# Altium PCB Sensorbox_Hub_ESP32.PCBDOC (part 1 of 3)
Units mil, origin at the board's own origin, x right, y up, seen from the top; angles counter-clockwise.
Board outline 895.86 x 2876.17 mil, 2 copper layers (Top, Bot), stack 61.855 mil thick; 68 components, 62 nets, 284 pads, 203 vias.
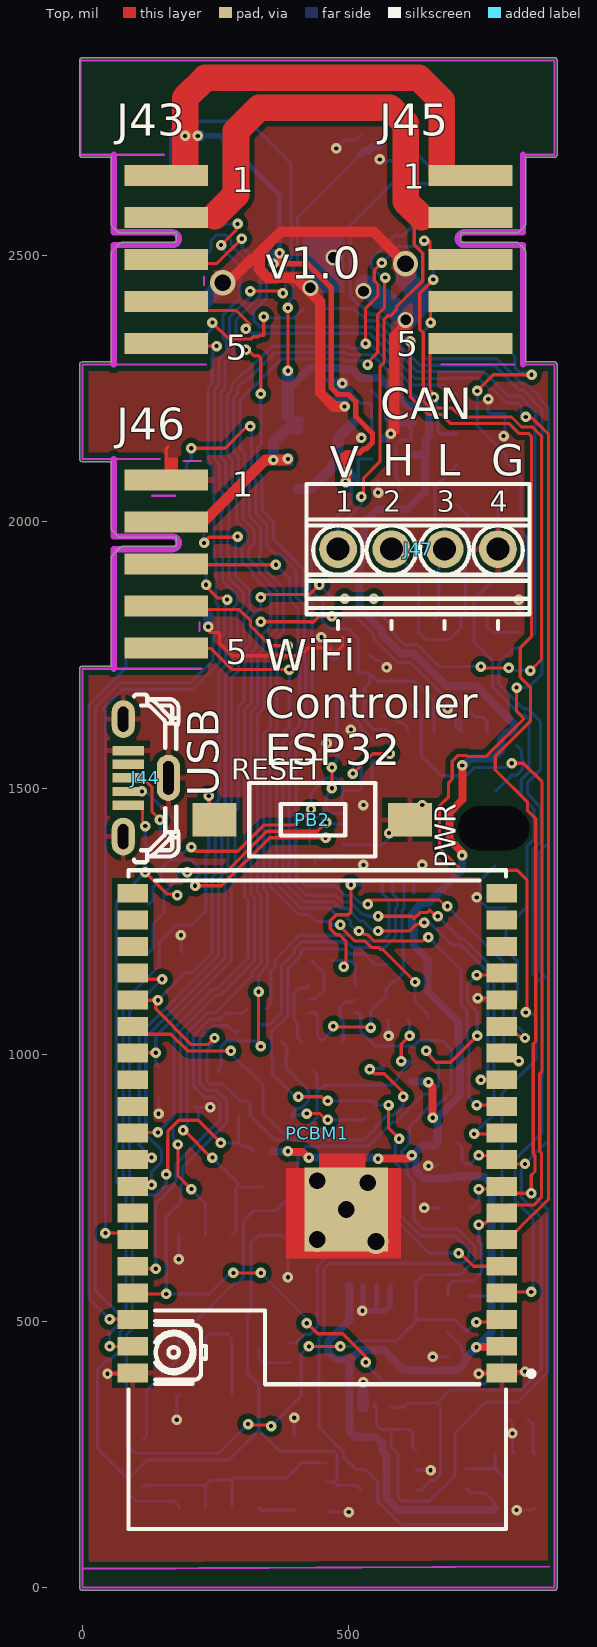
[diagram p0: Top view]
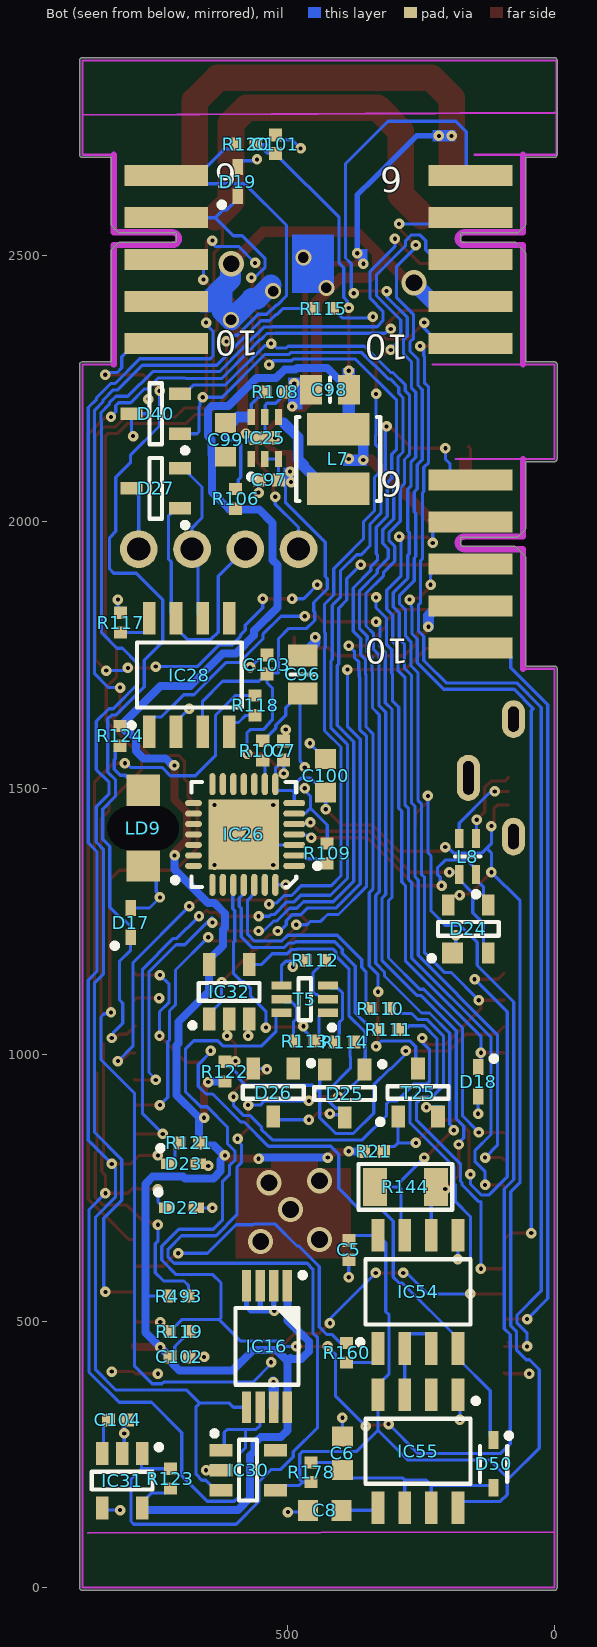
[diagram p1: Bot view, seen from below]
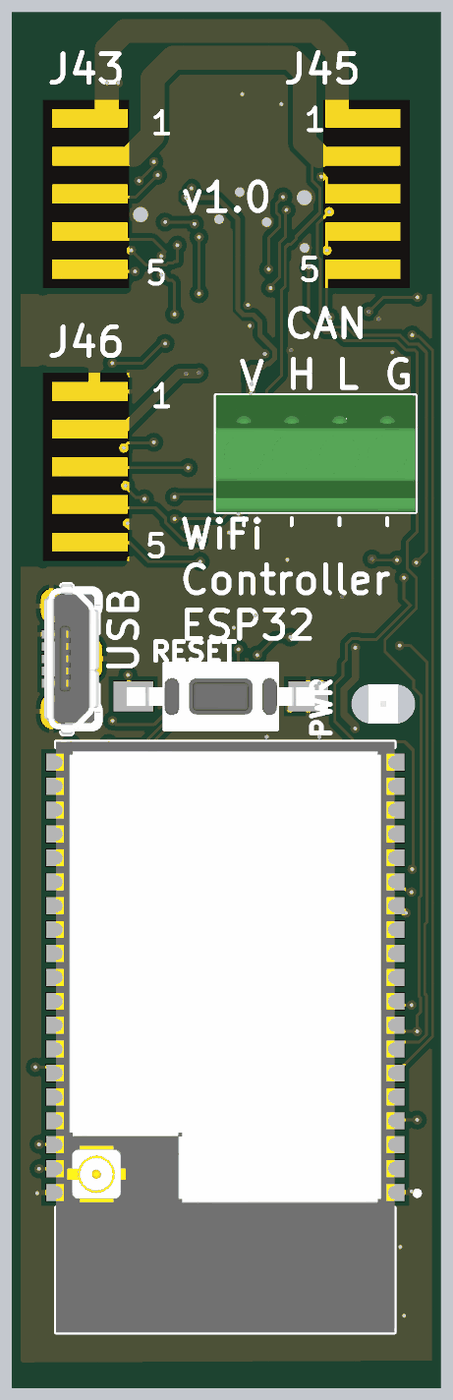
[diagram p3: 3D render of the assembled board from above, using the file's embedded part models]
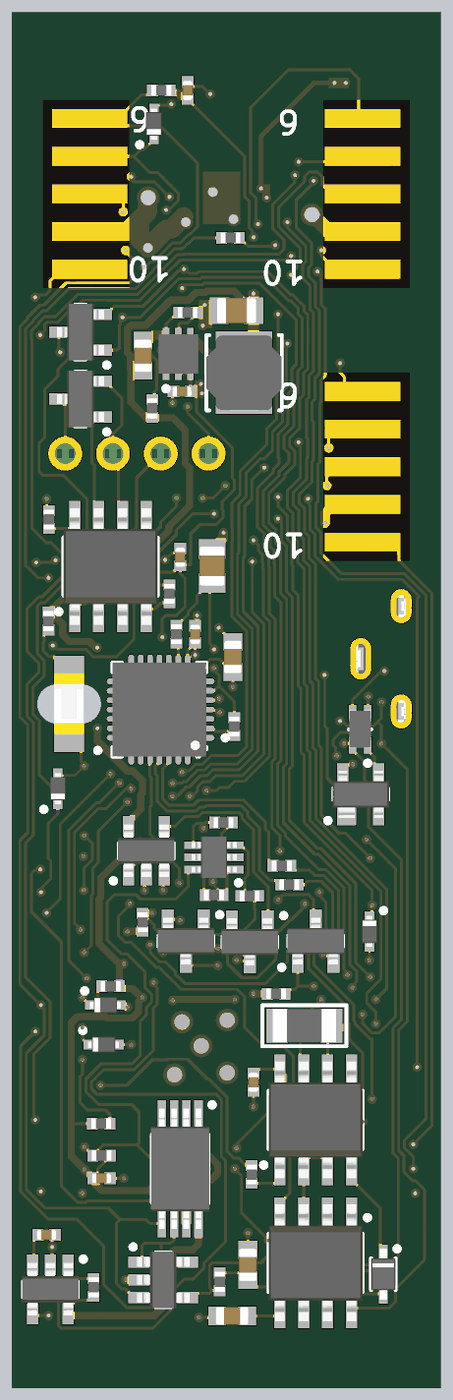
[diagram p4: 3D render of the assembled board from below, using the file's embedded part models]

## Layer stack, top to bottom
TopSolder: solder mask 0.4, Solder Resist, Dk 3.5
Top: signal copper 1.4
Dielectric1: core 59.0551, FR-4, Dk 4.8
Bot: signal copper 1.4
BottomSolder: solder mask 0.4, Solder Resist, Dk 3.5

## Board outline
-5.02,1724.41 cw(c0,1724.41) 0,1729.42 54.04,1729.42 54.04,1933.07 cw(c59.06,1933.07) 55.53,1936.63 55.51,1936.62 71.26,1952.36 71.24,1952.35 cw(c74.8,1948.82) 74.8,1953.83 176.09,1953.83 176.09,1971.36 70.87,1971.36 cw(c70.87,1976.38) 67.3,1972.85 67.32,1972.83 55.51,1984.64 55.53,1984.63 cw(c59.06,1988.19) 54.04,1988.19 54.04,2113.09 0,2113.09 cw(c0,2118.11) -5.01,2118.11 -5.01,2295.27 cw(c0,2295.27) 0,2300.29 54.04,2300.29 54.04,2503.94 cw(c59.06,2503.94) 55.53,2507.5 55.51,2507.48 71.26,2523.23 71.24,2523.21 cw(c74.8,2519.68) 74.8,2524.7 176.09,2524.7 176.09,2542.23 70.87,2542.23 cw(c70.87,2547.24) 67.3,2543.71 67.32,2543.7 55.51,2555.51 55.53,2555.49 cw(c59.06,2559.05) 54.04,2559.05 54.04,2683.96 0,2683.96 cw(c0,2688.98) -5.01,2688.98 -5.01,2866.14 cw(c0,2866.14) 0,2871.16 885.83,2871.16 cw(c885.83,2866.14) 890.84,2866.14 890.84,2688.97 cw(c885.83,2688.97) 885.83,2683.96 831.79,2683.96 831.79,2559.05 cw(c826.77,2559.05) 830.3,2555.49 830.32,2555.51 818.51,2543.7 818.52,2543.71 cw(c814.96,2547.24) 814.96,2542.23 709.74,2542.23 709.74,2524.7 814.96,2524.7 cw(c814.96,2519.68) 818.52,2523.21 818.51,2523.23 826.4,2515.34 ccw(c822.84,2511.81) 826.38,2515.35 ccw(c822.84,2511.81) 826.36,2515.37 826.4,2515.34 830.32,2511.42 830.3,2511.43 cw(c826.77,2507.87) 831.79,2507.87 831.79,2300.29 885.83,2300.29 cw(c885.83,2295.27) 890.84,2295.27 890.84,0 cw(c885.83,0) 885.83,-5.02 0,-5.02 cw(c0,0) -5.02,0

## Design rules (kind name [scope] priority, off if disabled: settings)
Clearance Clearance_DIFF [(InDifferentialPairClass('All Differential Pairs'))] p1: gap=5 ignorepadtopadclearanceinfootprint=FALSE except(0: Arc-Hole Track-Hole SMDPad-Hole THPad-Hole Via-Hole Fill-Hole Poly-Hole Region-Hole Text-Hole; 10: Arc-Poly Track-Poly SMDPad-Poly THPad-Poly Via-Poly Fill-Poly Poly-Poly Poly-Region Poly-Text)
Clearance [All] p2: gap=6 ignorepadtopadclearanceinfootprint=FALSE except(10: Arc-Poly Track-Poly SMDPad-Poly THPad-Poly Via-Poly Fill-Poly Poly-Poly)
DiffPairsRouting [All] p1: maxlimit=10 minlimit=5 mostfreqgap=5 toplayer_minwidth=5 toplayer_maxwidth=15 toplayer_prefwidth=10 bottomlayer_minwidth=5 bottomlayer_maxwidth=15 bottomlayer_prefwidth=10 maxuncoupledlength=500
FabricationTestPointUsage TestPointUsage [All] p1: valid=0 allowmultiple=FALSE
FabricationTestpoint Testpoint [All] p1: side=3 testpointundercomponent=TRUE minsize=40 maxsize=100 preferedsize=60 minholesize=20 maxholesize=40 preferedholesize=32 testpointgrid=1 allowsidetop=TRUE allowsidebottom=TRUE usegrid=TRUE gridtolerance=0.01
HoleSize [All] p1: absolutevalues=TRUE maxlimit=150 minlimit=1 maxpercent=80.000 minpercent=20.000
HoleToHoleClearance [All] p1: gap=1 allowstackedmicrovias=TRUE
MinimumSolderMaskSliver [All] p1: minsoldermaskwidth=0
PlaneClearance [All] p1: clearance=10
PlaneConnect [All] p1: planeconnectstyle=Direct reliefexpansion=20 reliefentries=4 reliefconductorwidth=10 reliefairgap=10
PolygonConnect PolygonConnect_pad [(InPadClass('All Pads'))] p1: connectstyle=Relief reliefconductorwidth=10 reliefentries=4 polygonreliefangle="90 Angle" airgapwidth=10
PolygonConnect [All] p2: connectstyle=Direct reliefconductorwidth=10 reliefentries=4 polygonreliefangle="45 Angle" airgapwidth=10
RoomDefinition Sensorbox_Hub_ESP32 [InComponentClass('Sensorbox_Hub_ESP32')] p1 off: confinementstyle=ConfineIn formatcopy=TRUE lockcomponents=FALSE outline 1777.55,517.7 8972.41,517.7 8972.41,1452.74 1777.55,1452.74
RoutingVias [All] p1: holewidth=7.87 width=19.68 viastyle="Through Hole" minholewidth=7.87 minwidth=19.68 maxholewidth=39.37 maxwidth=47.24
SilkToSilkClearance [All] p1: silktosilkclearance=0
SilkToSolderMaskClearance SilkscreenOverComponentPads [IsPad] p1: minsilkscreentomaskgap=0 clearancetoexposedcopper=TRUE
SolderMaskExpansion [All] p1: expansion=2
Width [All] p1: maxlimit=50 minlimit=5 preferedwidth=5
20 further rules are at their usual default settings.

## Components (designator, comment, footprint, x,y, rotation, side; value= is the part's Value field where it differs from the comment)
C5 "100nF" CAPC1005X55N 385.83,633.86 r270 bottom
C6 "10nF" CAPC1608X87N 397.64,251.97 r270 bottom
C7 "100nF" CAPC1005X55N 507.87,1570.87 r90 bottom
C8 "10nF" CAPC1608X87N 430.71,145.28 r180 bottom
C96 "10uF" CAPC2012X135N 472.44,1713.75 r270 bottom
C97 "1uF" CAPC1005X55N 535.43,2078.74 r180 bottom
C98 "10uF" CAPC2012X135N 421.26,2248.03 r0 bottom
C99 "68pF" CAPC1608X87N 617.13,2153.68 r270 bottom
C100 "1uF" CAPC1608X87N 429.13,1523.62 r90 bottom
C101 "1uF" CAPC1005X55N 523.62,2708.66 r270 bottom
C102 "1uF" CAPC1005X55N 703.74,433.07 r0 bottom
C103 "100nF" CAPC1005X55N 539.37,1732.28 r270 bottom
C104 "100nF" CAPC1005X55N 818.9,314.96 r0 bottom
D17 "PESD3V3S1UB" SODFL1608X65N 795.25,1247.9 r90 bottom
D18 "PESD3V3S1UB" SODFL1608X65N 143.17,949.41 r270 bottom
D19 "PESD3V3S1UB" SODFL1608X65N 594.49,2638.44 r90 bottom
D22 "PESD3V3S1UB" SODFL1608X65N 699.8,712.6 r180 bottom
D23 "PESD3V3S1UB" SODFL1608X65N 695.87,795.27 r180 bottom
D24 "PRTR5V0U2X" SOT190P230X110-4N 161.42,1236.22 r90 bottom
D25 "BAT54C" SOT95P240X130-3N 393.7,927.16 r270 bottom
D26 "BAT54C" SOT95P240X130-3N 527.56,929.13 r270 bottom
D27 "PESD1CAN-UX" SOT95P237X112-3N 748.03,2062.99 r0 bottom
D40 "SM712" SOT95P237X112-3N 748.03,2202.89 r0 bottom
D50 "1N4148WS" SODFL2512X100N 114.17,232.28 r270 bottom
IC16 "M24256-BRDW6" SOP65P640X120-8N 539.37,452.76 r270 bottom
IC25 "AUR9705AGD" SON65P200X200X80-7N-R65X145 543.31,2157.48 r90 bottom
IC26 "CP2102-GM" QFN50P500X500X100-29N-S335 582.68,1413.39 r0 bottom
IC28 "MCP2551-I/SN" SOIC127P600X175-8N 685.04,1712.6 r90 bottom
IC30 "24AA02E48T-I/OT" SOT95P280X145-5N 574.8,220.47 r180 bottom
IC31 "BD5230FVE-TR" SOT95P280X145-5N 811.02,200.79 r270 bottom
IC32 "74V1G66STR" SOT95P280X145-5N 610.24,1118.11 r90 bottom
IC54 "ST485ECDR" SOIC127P600X175-8N 255.91,555.12 r90 bottom
IC55 "NE555D" SOIC127P600X175-8N 255.91,255.91 r270 bottom
J43 "=Family" EDGE10T1B6_P200W1000L0F100X400 157.48,2649.61 r270 top locked
J44 "USB" MOLEX_105133-0011 86.61,1519.68 r90 top
J45 "=Family" EDGE10T5B10_P200W1000L0F100X400 728.35,2334.64 r90 top
J46 "=Family" EDGE10T1B6_P200W1000L0F100X400 157.48,2078.74 r270 top
J47 "=Family" PHOENIX_1725672 629.92,1948.82 r0 top
L7 "2.2uH" IND_MURATA_LQH44PN_P0 405.51,2118.11 r90 bottom
L8 "90R@100MHz" IND_MURATA_DLW21S 162.8,1372.05 r90 bottom
LD9 "Green" LED_KINGBRIGHT_KPTR3216 771.65,1425.2 r270 bottom
PB2 "Push Button" PB_TYCO_FSMSM 431.51,1440.87 r0 top
PCBM1 "ESP32-WROVER-I" PCBM_ESP32-WROVER-I 440.94,728.35 r180 top locked
R21 "100k" RESC1005X40N 338.58,818.9 r0 bottom
R106 "100k" RESC1005X40N 597.95,2043.31 r270 bottom
R107 "10k" RESC1005X40N 547.24,1570.87 r90 bottom
R108 "22k" RESC1005X40N 523.62,2244.09 r0 bottom
R109 "10k" RESC1005X40N 426.26,1377.95 r90 bottom
R110 "220" RESC1005X40N 326.77,1086.61 r180 bottom
R111 "220" RESC1005X40N 311.02,1047.24 r180 bottom
R112 "1k" RESC1005X40N 448.82,1177.17 r180 bottom
R113 "1k" RESC1005X40N 468.5,1025.59 r0 bottom
R114 "220" RESC1005X40N 393.7,1023.62 r180 bottom
R115 "220" RESC1005X40N 433.91,2400.32 r0 bottom
R117 "4k7" RESC1005X40N 814.17,1811.02 r270 bottom
R118 "1k" RESC1005X40N 561.76,1655.65 r270 bottom
R119 "1k" RESC1005X40N 703.74,480.31 r0 bottom
R120 "10k" RESC1005X40N 578.74,2708.66 r180 bottom
R121 "10k" RESC1005X40N 685.04,834.65 r180 bottom
R122 "1k" RESC1005X40N 618.11,968.5 r90 bottom
R123 "10k" RESC1005X40N 720.47,204.72 r90 bottom
R124 "1k" RESC1005X40N 814.96,1598.43 r90 bottom
R144 "120R" 1206R 279.53,751.97 r180 bottom
R160 "1k" RESC1005X40N 389.76,440.94 r270 bottom
R178 "3k9" RESC1005X40N 456.69,216.54 r90 bottom
R493 "1k" RESC1005X40N 704.92,547.24 r180 bottom
T5 "BC847BS" SOT65P210X110-6N 468.5,1104.33 r0 bottom
T25 "BSS138LT1G" SOT95P240X110-3N 255.91,929.13 r90 bottom

## Footprints (in the part's own frame and the unit in brackets; to place one, negate y for a bottom-side part, rotate by r counter-clockwise, add the part's x,y. Pads: shape width x height; smd on the part's side, far side on the other; paste and mask are expansions set on the pad)
1206R [mm]
  rect 1.15x1.8 smd: 1(-1.45,0) 2(1.45,0)
  silkscreen extent -2.24,-1.09 2.24,1.09, body extent -1.67,-0.87 1.68,0.88, height 0.65
CAPC1005X55N [mm] "Chip Capacitor, Body 1.0x0.55mm, IPC Medium Density"
  rect 0.62x0.62 smd: 1(-0.45,0) 2(0.45,0)
  body extent -0.52,-0.27 0.53,0.28, height 0.55
CAPC1608X87N [mm] "Chip Capacitor, Body 1.6x0.8mm IPC Medium Density"
  rect 0.95x1 smd: 1(-0.8,0) 2(0.8,0)
  body extent -0.87,-0.47 0.88,0.48, height 0.87
CAPC2012X135N [mm] "Chip Capacitor, Body 2.0x1.25mm, IPC Medium Density"
  rect 1.05x1.4 smd: 1(-0.9,0) 2(0.9,0)
  silkscreen extent 0,-0.58 0,0.58, body extent -1.05,-0.67 1.05,0.68, height 1.25
EDGE10T1B6_P200W1000L0F100X400 [mm] "10 contacts Board Edge Connector, First Left Top Pad 1, First Left Bottom Pad 2, Pitch 2mm, Length 0mm, Width 10mm, Finger Lenght 4mm, Finger Width 1mm"
  rect 1x4 smd paste-0.5: 1(0,0) 2(2,0) 3(4,0) 4(6,0) 5(8,0)
  rect 1x4 smd far side paste-0.5: 6(0,0) 7(2,0) 8(4,0) 9(6,0) 10(8,0)
  KeepOutLayer lines w0.3: 9,-2.5 3.3,-2.5 3.3,0.3 ccw(c3,0.3) 2.7,0.3 2.7,-2.5 -1,-2.5
EDGE10T5B10_P200W1000L0F100X400 [mm] "10 contacts Board Edge Connector, First Left Top Pad 5, First Left Bottom Pad 10, Pitch 2mm, Length 0mm, Width 10mm, Finger Lenght 4mm, Finger Width 1mm"
  rect 1x4 smd paste-0.5: 1(8,0) 2(6,0) 3(4,0) 4(2,0) 5(0,0)
  rect 1x4 smd far side paste-0.5: 6(8,0) 7(6,0) 8(4,0) 9(2,0) 10(0,0)
  KeepOutLayer lines w0.3: -1,-2.5 4.7,-2.5 4.7,0.3 cw(c5,0.3) 5.3,0.3 5.3,-2.5 9,-2.5
IND_MURATA_DLW21S [mm] "Common Mode Choke Coil, DLW21S Series - Body 2 x 1.2mm"
  rect 0.9x0.4 smd: 1(-0.85,-0.4) 2(0.85,-0.4) 3(0.85,0.4) 4(-0.85,0.4)
  silkscreen extent -1.92,-0.6 0,0.6, body extent -1,-0.6 1,0.6, height 1.4
IND_MURATA_LQH44PN_P0 [mm] "Wire Wound Ferrite Inductor for Power Lines, 4mm L X 4mm W X 1.65mm H, MURATA LQH44PN_P0 Series"
  rect 1.55x3 smd: 1(-1.425,0) 2(1.425,0)
  silkscreen extent -2,-2 2,2, body extent -2,-2 2,2, height 1.65
LED_KINGBRIGHT_KPTR3216 [mm] "Reverse Mount LED 3216, Hole 2.1x2.3mm 0.35mm Height"
  rect 1.5x1.6 smd: 1(1.8,0) 2(-1.8,0)
  oval 1.9x3 hole 2.1 slot 3.4 at 90 deg unplated mask+0.1: 3(0,0)
  silkscreen extent 2.35,1.4 2.6,1.65, body extent -1.6,-0.8 1.6,0.8, height 0.25
MOLEX_105133-0011 [mm] "0.65mm Pitch, Micro-USB Type B Surface Mounte Vertical Receptacle"
  rect 0.45x1.5 smd: 1(-1.3,0) 2(-0.65,0) 3(0,0) 4(0.65,0) 5(1.3,0)
  oval 1.8x1.1 hole 0.5 slot 1.2 at 0 deg: 6(-2.8,0.25) 6(2.8,0.25)
  oval 2.2x1.1 hole 0.5 slot 1.6 at 0 deg: 6(0,-1.9)
  silkscreen extent -4.03,-2.38 3.98,-0.26, body extent -4.02,-2.38 3.98,0.63, height 6.68
PB_TYCO_FSMSM [mm] "Body 3.5x6.0mm, Pushbutton Switch,  TYCO FSMSM Serie"
  rect 2.1x1.6 smd: 1(-4.65,0) 2(4.65,0)
  silkscreen extent -3,-1.75 3,1.75, body extent -5,-1.75 5,1.75, height 4.3
PCBM_ESP32-WROVER-I [mm] "Generic WiFi-BT-BLE MCU Module (IPEX antenna) ,Body 18.00mm x 31.4mm"
  rect 1.45x0.9 smd: 1(-8.8,8.26) 2(-8.8,6.99) 3(-8.8,5.72) 4(-8.8,4.45) 5(-8.8,3.18) 6(-8.8,1.91) 7(-8.8,0.64) 8(-8.8,-0.63) 9(-8.8,-1.9) 10(-8.8,-3.17) 11(-8.8,-4.44) 12(-8.8,-5.71) 13(-8.8,-6.98) 14(-8.8,-8.25) 15(-8.8,-9.52) 16(-8.8,-10.79) 17(-8.8,-12.06) 18(-8.8,-13.33) 19(-8.8,-14.6) 20(8.8,-14.6) 21(8.8,-13.33) 22(8.8,-12.06) 23(8.8,-10.79) 24(8.8,-9.52) 25(8.8,-8.25) 26(8.8,-6.98) 27(8.8,-5.71) 28(8.8,-4.44) 29(8.8,-3.17) 30(8.8,-1.9) 31(8.8,-0.63) 32(8.8,0.64) 33(8.8,1.91) 34(8.8,3.18) 35(8.8,4.45) 36(8.8,5.72) 37(8.8,6.99) 38(8.8,8.26)
  rect 4x4 smd: 39(-1.38,0.47)
  silkscreen extent -10.33,-15.7 9,15.7, body extent -9,-15.7 9,15.7, height 3.64
PHOENIX_1725672 [mm] "Micro PCB Terminal Block, Pitch 2.54mm, 4 Positions, Screw Connection"
  round 1.8 hole 1.1: 1(-3.81,0) 2(-1.27,0) 3(1.27,0) 4(3.81,0)
  silkscreen extent -5.31,-3.81 5.31,3.1, body extent -5.31,-3.1 5.31,3.1, height 8.5
QFN50P500X500X100-29N-S335 [mm] "QFN, 0.50mm Pitch, Square; 28 pin, 5.00mm L X 5.00mm W X 1.00mm H body (w/thermal tab 3.35 X 3.35mm),  IPC Medium Density"
  oval 1.05x0.3 smd: 1(-2.4,1.5) 2(-2.4,1) 3(-2.4,0.5) 4(-2.4,0) 5(-2.4,-0.5) 6(-2.4,-1) 7(-2.4,-1.5)
  oval 0.3x1.05 smd: 8(-1.5,-2.4) 9(-1,-2.4) 10(-0.5,-2.4) 11(0,-2.4) 12(0.5,-2.4) 13(1,-2.4) 14(1.5,-2.4) 22(1.5,2.4) 23(1,2.4) 24(0.5,2.4) 25(0,2.4) 26(-0.5,2.4) 27(-1,2.4) 28(-1.5,2.4)
  oval 0.8x0.3 smd: 15(2.4,-1.5) 16(2.4,-1) 17(2.4,-0.5) 18(2.4,0) 19(2.4,0.5) 20(2.4,1) 21(2.4,1.5)
  rect 3.35x3.35 smd: 29(0,0)
  silkscreen extent -3.62,-2.5 2.5,2.5, body extent -2.5,-2.5 2.5,2.5, height 1
RESC1005X40N [mm] "Chip Resistor, EIA 0402, Metric 1005, Body 1.0x0.5mm, IPC Medium Density"
  rect 0.58x0.62 smd: 1(-0.47,0) 2(0.47,0)
  body extent -0.52,-0.27 0.53,0.28, height 0.4
SODFL1608X65N [mm] "Ultra Small Outline Diode Flat Lead (SOD-523), Body; 1.2mm L X 0.8mm W X 0.65mm H, IPC Medium Density"
  rect 0.75x0.5 smd: 1(-0.7,0) 2(0.7,0)
  silkscreen extent -1.22,0.63 -0.98,0.88, body extent -0.82,-0.42 0.83,0.43, height 0.65
SODFL2512X100N [mm] "SODFL Diode; 1.70mm W X 1.25mm L X 1.00mm H body, IPC Medium Density"
  rect 0.84x0.46 smd: 1(-1.14,0) 2(1.14,0)
  silkscreen extent -1.47,-0.65 0.85,0.85, body extent -1.35,-0.65 1.35,0.65, height 1
SOIC127P600X175-8N [mm] "SOIC 8, Pitch 1.27mm - Body 4x5mm, IPC Medium Density"
  rect 1.55x0.6 smd: 1(-2.7,1.905) 2(-2.7,0.635) 3(-2.7,-0.635) 4(-2.7,-1.905) 5(2.7,-1.905) 6(2.7,-0.635) 7(2.7,0.635) 8(2.7,1.905)
  silkscreen extent -2.52,-2.5 1.55,2.88, body extent -3.1,-2.5 3.1,2.5, height 1.75
SON65P200X200X80-7N-R65X145 [mm] "SON, 0.65mm Pitch, 6 Pin, 2.00mm W X 2.00mm L X 0.80mm H body (W/Thermal Tab 0.65mm X 1.45mm), IPC Medium Density"
  rect 0.75x0.35 smd: 1(-1,0.65) 2(-1,0) 3(-1,-0.65) 4(1,-0.65) 5(1,0) 6(1,0.65)
  rect 0.65x1.45 smd: 7(0,0)
  silkscreen extent -1.97,0.53 -1.73,0.78, body extent -1.05,-1.05 1.05,1.05, height 0.77
SOP65P640X120-8N [mm] "SOP, 0.65mm pitch; 8 pin, 4.40mm W X 3.00mm L X 1.20mm H body, IPC Medium Density"
  rect 1.5x0.45 smd: 1(-2.9,0.975) 2(-2.9,0.325) 3(-2.9,-0.325) 4(-2.9,-0.975) 5(2.9,-0.975) 6(2.9,-0.325) 7(2.9,0.325) 8(2.9,0.975)
  silkscreen extent -3.52,-1.5 1.83,1.82, body extent -3.2,-1.55 3.2,1.55, height 1.2
SOT65P210X110-6N [mm] "SOT363, SC70-6, SOT, 0.65mm Pitch, 6 pin, 1.25mm W X 2.00mm L X 1.10mm H, IPC Medium Density"
  rect 0.95x0.4 smd: 1(-1.1,0.65) 2(-1.1,0) 3(-1.1,-0.65) 4(1.1,-0.65) 5(1.1,0) 6(1.1,0.65)
  silkscreen extent -1.42,-1 0.3,1.47, body extent -1.2,-1.1 1.2,1.1, height 1.1
SOT95P237X112-3N [mm] "SOT, 0.95mm, pitch; 3 pin,1.30mm W X 2.92mm L X 1.12mm H body, IPC Medium Density"
  rect 1.05x0.6 smd: 1(-1.15,0.95) 2(-1.15,-0.95) 3(1.15,0)
  silkscreen extent -1.52,-1.45 0.3,1.87, body extent -1.25,-1.5 1.25,1.5, height 1.1
SOT95P240X110-3N [mm] "SOT23 3-Leads, Pitch 0.95mm, Body 1.3x2.9mm, IPC Medium Density"
  rect 1.05x0.65 smd: 1(-1.15,0.95) 2(-1.15,-0.95) 3(1.15,0)
  silkscreen extent -1.52,-1.45 0.3,1.92, body extent -1.25,-1.5 1.25,1.5, height 1.1
SOT95P240X130-3N [mm] "SOT23 3-Leads, Pitch 0.95mm - Body 1.3x2.9mm, IPC Medium Density"
  rect 1.05x0.65 smd: 1(-1.15,0.95) 2(-1.15,-0.95) 3(1.15,0)
  silkscreen extent -1.52,-1.45 0.3,1.92, body extent -1.25,-1.5 1.25,1.5, height 1.3
SOT95P280X145-5N [mm] "SOT, 0.95mm pitch; 5 pin, 1.60mm W X 2.90mm L X 1.45mm H body, IPC Medium Density"
  rect 1.1x0.6 smd: 1(-1.3,0.95) 2(-1.3,0) 3(-1.3,-0.95) 4(1.3,-0.95) 5(1.3,0.95)
  silkscreen extent -1.73,-1.45 0.43,1.87, body extent -1.4,-1.5 1.4,1.5, height 1.45
SOT190P230X110-4N [mm] "SOT143, SOT, 1.90mm Pitch; 4 Pin, 1.30mm W X 2.90mm L X 1.10mm H body, IPC Medium Density"
  rect 1x1 smd: 1(-1.15,0.75)
  rect 1x0.6 smd: 2(-1.15,-0.95) 3(1.15,-0.95) 4(1.15,0.95)
  silkscreen extent -1.52,-1.45 0.33,1.88, body extent -1.25,-1.5 1.25,1.5, height 1.1

## Part data
C5 C7: library part CC0402_100NF_16V_10%_X7R, "Non-polarised capacitor", Case=0402, Manufacturer=GENERIC, Manufacturer1 ComponentHeight=0.55mm, Manufacturer1 Example=MURATA, Manufacturer1 Part Number=GRM155R71C104KA88D, Tolerance=±10%, Voltage=16V, Author="CERN DEM JLC", Component Type=Standard, CreateDate=05.12.2013, HelpURL=\\cern.ch\dfs\Applications\Altium\Datasheets\CC0402_X7R_MURATA_GRM.pdf, LatestRevisionDate=03.12.2007, Manufacturer Part Number=CC0402_100NF_16V_10%_X7R, Mounted=Yes, Part Description="SMD Multilayer Chip Ceramic Capacitor", Part Number=CC0402_100NF_16V_10%_X7R, Pin Count=2, Sense=No, SMD=Yes, Socket=No, Status="Not Recommended", TC=X7R
C6 C8: library part CC0603_10NF_50V_5%_C0G, "Non-polarised capacitor", Case=0603, Manufacturer=GENERIC, Manufacturer1 ComponentHeight=0.9mm, Manufacturer1 Example=TDK, Manufacturer1 Part Number=C1608C0G1H103J080AA, Tolerance=±5%, Voltage=50V, Author="CERN DEM JLC", Component Type=Standard, CreateDate=10.12.2014, HelpURL=\\cern.ch\dfs\Applications\Altium\Datasheets\CC0603_C0G_TDK_C.pdf, LatestRevisionDate=10.12.2014, Manufacturer Part Number=CC0603_10NF_50V_5%_C0G, Mounted=Yes, Part Description="SMD Multilayer Chip Ceramic Capacitor", Part Number=CC0603_10NF_50V_5%_C0G, Pin Count=2, Sense=No, SMD=Yes, Socket=No, Status=Preferred, TC=C0G/NP0
C96 C98: library part CC0805_10UF_16V_10%_X5R, "Non-polarised capacitor", Case=0805, Manufacturer=GENERIC, Manufacturer1 ComponentHeight=1.4mm, Manufacturer1 Example=KEMET, Manufacturer1 Part Number=C0805C106K4PAC, Tolerance=±10%, Voltage=16V, Author="CERN DEM JLC", Component Type=Standard, CreateDate=03.12.2007, HelpURL=\\cern.ch\dfs\Applications\Altium\Datasheets\CC1206_X5R_KEMET.pdf, LatestRevisionDate=03.12.2007, Manufacturer Part Number=CC0805_10UF_16V_10%_X5R, Mounted=Yes, Part Description="SMD Multilayer Chip Ceramic Capacitor", Part Number=CC0805_10UF_16V_10%_X5R, Pin Count=2, Sense=No, SMD=Yes, Socket=No, Status=Preferred, TC=X5R
C97 C101 C102: library part CC0402_1UF_16V_10%_X5R, "Non-polarised capacitor", Case=0402, Manufacturer=GENERIC, Manufacturer1 ComponentHeight=0.55mm, Manufacturer1 Example=TDK, Manufacturer1 Part Number=C1005X5R1C105KT, Tolerance=±10%, Voltage=16V, Author="CERN DEM JLC", Component Type=Standard, CreateDate=25.10.2012, HelpURL=\\cern.ch\dfs\Applications\Altium\Datasheets\CC0402_X5R_TDK_C.pdf, LatestRevisionDate=25.10.2012, Manufacturer Part Number=CC0402_1UF_16V_10%_X5R, Mounted=Yes, Part Description="SMD Multilayer Chip Ceramic Capacitor", Part Number=CC0402_1UF_16V_10%_X5R, Pin Count=2, Sense=No, SMD=Yes, Socket=No, Status=Preferred, TC=X5R
C99: library part CC0603_68PF_50V_5%_NP0, "Non-polarised capacitor", Case=0603, Manufacturer=GENERIC, Manufacturer1 ComponentHeight=0.87mm, Manufacturer1 Example=PHYCOMP, Manufacturer1 Part Number=223886715689, Tolerance=±5%, Voltage=50V, Author="CERN DEM JLC", Component Type=Standard, CreateDate=03.12.2007, HelpURL=\\cern.ch\dfs\Applications\Altium\Datasheets\CC0603_NP0_PHYCOMP.pdf, LatestRevisionDate=03.12.2007, Manufacturer Part Number=CC0603_68PF_50V_5%_NP0, Mounted=Yes, Part Description="SMD Multilayer Chip Ceramic Capacitor", Part Number=CC0603_68PF_50V_5%_NP0, Pin Count=2, Sense=No, SMD=Yes, Socket=No, Status=Preferred, TC=C0G/NP0
C100: library part CC0603_1UF_25V_10%_X7R, "Non-polarised capacitor", Case=0603, Manufacturer=GENERIC, Manufacturer1 ComponentHeight=0.9mm, Manufacturer1 Example=MURATA, Manufacturer1 Part Number=GRM188R71E105KA12D, Tolerance=±10%, Voltage=25V, Author="CERN DEM JLC", Component Type=Standard, CreateDate=2011-01-18, HelpURL=\\cern.ch\dfs\Applications\Altium\Datasheets\CC0603_X7R_MURATA.pdf, LatestRevisionDate=2011-01-18, Manufacturer Part Number=CC0603_1UF_25V_10%_X7R, Mounted=Yes, Part Description="SMD Multilayer Chip Ceramic Capacitor", Part Number=CC0603_1UF_25V_10%_X7R, Pin Count=2, SMD=Yes, Socket=No, Status=None, Table="Capacitors SMD", TC=X7R
C103 C104: library part CC0402_100NF_16V_10%_X5R, "Non-polarised capacitor", Case=0402, Manufacturer=GENERIC, Manufacturer1 ComponentHeight=0.55mm, Manufacturer1 Example=MURATA, Manufacturer1 Part Number=GRM155R61C104KA88D, Tolerance=±10%, Voltage=16V, Author="CERN DEM JLC", Component Type=Standard, CreateDate=10.12.2013, HelpURL=\\cern.ch\dfs\Applications\Altium\Datasheets\CC0402_X5R_MURATA_GRM.pdf, LatestRevisionDate=10.12.2013, Manufacturer Part Number=CC0402_100NF_16V_10%_X5R, Mounted=Yes, Part Description="SMD Multilayer Chip Ceramic Capacitor", Part Number=CC0402_100NF_16V_10%_X5R, Pin Count=2, Sense=No, SMD=Yes, Socket=No, Status=None, TC=X5R
D17 D18 D19 D22 D23: "ESD protection diode", Case=SOD523, Manufacturer="NXP SEMICONDUCTORS", Power=330W, Voltage=3V3, Author="CERN DEM JLC", Bonding=No, ComponentHeight=0.65mm, Component Type=Standard, CreateDate=29.11.2012, Device=PESD3V3S1UB, HelpURL=\\cern.ch\dfs\Applications\Altium\Datasheets\PESD3V3S1UB.pdf, LatestRevisionDate=29.11.2012, Manufacturer Part Number=PESD3V3S1UB, Mounted=Yes, PackageDescription="Ultra Small Outline Diode Flat Lead (SOD-523), Body; 1.2mm L X 0.8mm W X 0.65mm H, IPC Medium Density", Part Description="ESD protection diode (23kV)", Part Number=PESD3V3S1UB, Pin Count=2, PressFit=No, Sense=No, SMD=Yes, Socket=No
D24: "Ultra Low Capacitance Double Rail-to-Rail ESD Protection Diode", Case=SOT143B, Manufacturer="NXP SEMICONDUCTORS", Voltage=5.5V, Author="CERN DEM JLC", Bonding=No, ComponentHeight=1.1mm, Component Type=Standard, CreateDate=2011-03-22, Device=PRTR5V0U2X, HelpURL=\\cern.ch\dfs\Applications\Altium\Datasheets\PRTR5V0U2X.pdf, LatestRevisionDate=2011-03-22, Manufacturer Part Number=PRTR5V0U2X, Mounted=Yes, PackageDescription="SOT143B, SOT, 1.90mm Pitch; 4 Pin, 1.30mm W X 2.90mm L X 1.10mm H body, IPC Medium Density", Part Description="Ultra Low Capacitance (1pF) Double Rail-to-Rail ESD Protection Diode (8kV)", Part Number=PRTR5V0U2X, Pin Count=4, PressFit=No, SMD=Yes, Socket=No, Table=Diodes
D25 D26: "Dual Common Cathode Schottky Diodes", Case=SOT23-3, Manufacturer="FAIRCHILD SEMICONDUCTOR", Power=200mA, Voltage=30V, Author="CERN DEM JLC", Bonding=No, ComponentHeight=1.30mm, Component Type=Standard, CreateDate=17.09.2009, Device=BAT54C, HelpURL=\\cern.ch\dfs\Applications\Altium\Datasheets\BAT54C.pdf, LatestRevisionDate=27.05.2010, Manufacturer Part Number=BAT54C, Mounted=Yes, PackageDescription="SOT23 3-Leads, Pitch 0.95mm - Body 1.3x2.9mm, IPC Medium Density", Part Description="Dual Common Cathode Small Signal Schottky Diode", Part Number=BAT54C, Pin Count=3, PressFit=No, Sense=No, SMD=Yes, Socket=No
D27: "TVS Diode for CAN", Case=SOT-23, Manufacturer=Nexperia, Power=400W, Voltage=24V, Author="CERN DEM JLC", Bonding=No, ComponentHeight=1.12mm, Component Type=Standard, CreateDate=03.09.2014, Device=PESD1CAN-UX, HelpURL=\\cern.ch\dfs\Applications\Altium\Datasheets\SM712.TCT.pdf, LatestRevisionDate=13.01.2015, Manufacturer Part Number=PESD1CAN-UX, Mounted=Yes, PackageDescription="SOT, 0.95mm, pitch; 3 pin,1.30mm W X 2.92mm L X 1.12mm H body, IPC Medium Density", Part Description="TVS Diode for CAN", Part Number=PESD1CAN-UX, Pin Count=3, PressFit=No, Sense=No, SMD=Yes, Socket=No
D40: "Asymmetrical TVS Diode for Extended Common-Mode RS-485", Case=SOT-23, Manufacturer=SEMTECH, Power=400W, Voltage=12V/-7V, Author="CERN DEM JLC", Bonding=No, ComponentHeight=1.12mm, Component Type=Standard, CreateDate=23.04.2012, Device=SM712, HelpURL=\\cern.ch\dfs\Applications\Altium\Datasheets\SM712.pdf, LatestRevisionDate=23.04.2012, Manufacturer Part Number=SM712, Mounted=Yes, PackageDescription="SOT, 0.95mm, pitch; 3 pin,1.30mm W X 2.92mm L X 1.12mm H body, IPC Medium Density", Part Description="Asymmetrical TVS Diode for Extended Common-Mode RS-485", Part Number=SM712, Pin Count=3, PressFit=No, Sense=No, SMD=Yes, Socket=No, Status=Obsolete
D50: "Diode", Case=SOD-323F, Manufacturer="FAIRCHILD SEMICONDUCTOR", Power=150mA, Voltage=75V, Author="CERN DEM JLC", Bonding=No, ComponentHeight=1mm, Component Type=Standard, CreateDate=12.05.2011, Device=1N4148WS, HelpURL=\\cern.ch\dfs\Applications\Altium\Datasheets\1N4148WS.pdf, LatestRevisionDate=12.05.2011, Manufacturer Part Number=1N4148WS, Mounted=Yes, PackageDescription="SODFL Diode; 1.70mm W X 1.25mm L X 1.00mm H body, IPC Medium Density", Part Description="Small Signal Diodes", Part Number=1N4148WS, Pin Count=2, PressFit=No, Sense=No, SMD=Yes, Socket=No
IC16: "256-Kbit Serial I²C Bus EEPROM", Case=TSSOP8, Manufacturer="ST MICROELECTRONICS", Part Number=M24256-BRDW6P, Author="CERN DEM MR", Bonding=No, ComponentHeight=1.2mm, Component Type=Standard, CreateDate=17.03.2016, Device=M24256-BRDW6, HelpURL=\\cern.ch\dfs\Applications\Altium\Datasheets\M24256-BRDW6P.pdf, LatestRevisionDate=17.03.2016, Manufacturer Part Number=M24256-BRDW6, Mounted=Yes, PackageDescription="SOP, 0.65mm pitch; 8 pin, 4.40mm W X 3.00mm L X 1.20mm H body, IPC Medium Density", Part Description="256-Kbit Serial I²C Bus EEPROM", Pin Count=8, PressFit=No, Sense=No, SMD=Yes, Socket=No
IC25: "0V to 6V Input, 1A, 1.5MHz, Step-Down DC-DC Converter", Case=SON6, Manufacturer="DIODES INCORPORATED", Author="CERN DEM MR", Bonding=No, ComponentHeight=0.8mm, Component Type=Standard, CreateDate=15.02.2018, Device=AUR9705AGD, HelpURL=\\cern.ch\dfs\Applications\Altium\Datasheets\AUR9705AGD.pdf, LatestRevisionDate=15.02.2018, Manufacturer Part Number=AUR9705AGD, Mounted=Yes, PackageDescription="SON, 0.65mm Pitch, 6 Pin, 2.00mm W X 2.00mm L X 0.80mm H body (W/Thermal Tab 0.65mm X 1.45mm), IPC Medium Density", Part Description="0V to 6V Input, 1A, 1.5MHz, Step-Down DC-DC Converter", Part Number=AUR9705AGD, Pin Count=7, PressFit=No, Sense=No, SMD=Yes, Socket=No
IC26: "Single-Chip USB to UART Bridge", Case=QFN28, Manufacturer="SILICON LABS", Author="CERN DEM JLC", ComponentHeight=1.0mm, Component Type=Standard, CreateDate=2011-03-03, Device=CP2102-GM, HelpURL=\\cern.ch\dfs\Applications\Altium\Datasheets\CP2102-GM.pdf, LatestRevisionDate=2011-03-03, Manufacturer Part Number=CP2102-GM, Mounted=Yes, PackageDescription="QFN, 0.50mm Pitch, Square; 28 pin, 5.00mm L X 5.00mm W X 1.00mm H body (w/thermal tab 3.35 X 3.35mm),  IPC Medium Density", Part Description="Single-Chip USB to UART Bridge", Part Number=CP2102-GM, Pin Count=29, SMD=Yes, Socket=No, Table="Analog & Interface"
IC28: "High-Speed CAN Transceiver, 8-Pin SOIC, Industrial Temperature", Case=SOIC8, Manufacturer="MICROCHIP TECHNOLOGY", Author=GK, Bonding=No, ComponentHeight=1.75mm, Component Type=Standard, CreateDate=07.09.2016, Device=MCP2551-I/SN, LatestRevisionDate=07.09.2016, Manufacturer Part Number=MCP2551-I/SN, Mounted=Yes, PackageDescription="SOIC 8, Pitch 1.27mm - Body 4x5mm, IPC Medium Density", Part Description="High-Speed CAN Transceiver", Part Number=MCP2551-I/SN, Pin Count=8, PressFit=No, Sense=No, SMD=Yes, Socket=No
IC30: "1.7V-5.5V, 2K I2C Serial EEPROM With EUI-48 Node Identity", Case=SOT23-5, Manufacturer="MICROCHIP TECHNOLOGY", Author="CERN DEM MR", Bonding=No, ComponentHeight=1.45mm, Component Type=Standard, CreateDate=31.03.2016, Device=24AA02E48T-I/OT, HelpURL=\\cern.ch\dfs\Applications\Altium\Datasheets\24AA02E48T-I-OT.pdf, LatestRevisionDate=31.03.2016, Manufacturer Part Number=24AA02E48T-I/OT, Mounted=Yes, PackageDescription="SOT, 0.95mm pitch; 5 pin, 1.60mm W X 2.90mm L X 1.45mm H body, IPC Medium Density", Part Description="1.7V-5.5V, 2K I2C Serial EEPROM With EUI-48 Node Identity", Part Number=24AA02E48T-I/OT, Pin Count=5, PressFit=No, Sense=No, SMD=Yes, Socket=No
IC31: "Free Delay Time Setting  CMOS Voltage Detector", Case=SOT23-5, Manufacturer=Rohm, Author=GK, Bonding=No, ComponentHeight=1.45mm, Component Type=Standard, CreateDate=02.03.2015, Device=BD5230FVE-TR, HelpURL=\\cern.ch\dfs\Applications\Altium\Datasheets\TPS3808G50DBVT.pdf, LatestRevisionDate=02.03.2015, Manufacturer Part Number=BD5230FVE-TR, Mounted=Yes, PackageDescription="SOT23, 5-Leads, Body 1.6x3.0mm, Pitch 0.95mm, IPC Medium Density", Part Description="5V, Low Quiescent Current, Programmable-Delay Supervisory Circuit", Part Number=BD5230FVE-TR, Pin Count=5, PressFit=No, Sense=No, SMD=Yes, Socket=No
IC32: "Single Bilateral Switch", Case=SOT23-5, Manufacturer="ST MICROELECTRONICS", Author="CERN DEM JLC", Bonding=No, ComponentHeight=1.45mm, Component Type=Standard, CreateDate=20.01.2014, Device=74V1G66STR, HelpURL=\\cern.ch\dfs\Applications\Altium\Datasheets\74V1G66STR.pdf, LatestRevisionDate=20.01.2014, Manufacturer Part Number=74V1G66STR, Mounted=Yes, PackageDescription="SOT, 0.95mm pitch; 5 pin, 1.60mm W X 2.90mm L X 1.45mm H body, IPC Medium Density", Part Description="Single Bilateral Switch", Part Number=74V1G66STR, Pin Count=5, PressFit=No, Sense=No, SMD=Yes, Socket=No
IC54: "±15kV ESD-Protected, Low Power  RS-485/RS-422 Transceiver", Case=SOIC8, Manufacturer="ST MICROELECTRONICS", Author="CERN DEM MR", Bonding=No, ComponentHeight=1.75mm, Component Type=Standard, CreateDate=15.02.2018, Device=ST485ECDR, HelpURL=\\cern.ch\dfs\Applications\Altium\Datasheets\ST485ECDR.pdf, LatestRevisionDate=15.02.2018, Manufacturer Part Number=ST485ECDR, Mounted=Yes, PackageDescription="SOIC 8, Pitch 1.27mm - Body 4x5mm, IPC Medium Density", Part Description="±15kV ESD-Protected, Low Power  RS-485/RS-422 Transceiver", Part Number=ST485ECDR, Pin Count=8, PressFit=No, Sense=No, SMD=Yes, Socket=No
IC55: "Precision Timer", Case=SOIC8, Manufacturer="TEXAS INSTRUMENTS", Author="CERN DEM JMW", Bonding=No, ComponentHeight=1.75mm, Component Type=Standard, CreateDate=16.04.2009, Device=NE555D, HelpURL=\\cern.ch\dfs\Applications\Altium\Datasheets\NE555D.pdf, LatestRevisionDate=16.04.2009, Manufacturer Part Number=NE555D, Mounted=Yes, PackageDescription="SOIC 8, Pitch 1.27mm, Body 4x5mm, IPC Medium Density", Part Description="Precision Timer", Part Number=NE555D, Pin Count=8, PressFit=No, Sense=No, SMD=Yes, Socket=No
J43 J46: library part EDGE10T1B6_P200W1000L0F100X400, "PCB Edge Connector 10 (2x5)", Author="CERN DEM MR", ComponentHeight=0mm, Component Type="Standard (No BOM)", CreateDate=14.02.2018, HelpURL=\\cern.ch\dfs\Applications\Altium\Datasheets\EDGE10T1B6_P200W1000L0F100X400.pdf, LatestRevisionDate=14.02.2018, Mounted=No, Part Description="10 Contacts Board Edge Connector, Pitch 2mm, Length 0mm, Width 10mm, Finger Lenght 4mm, Finger Width 1mm", Part Number=EDGE10T1B6_P200W1000L0F100X400, Pin Count=10, PressFit=No, Sense=No, SMD=No, Socket=No, Status=None
J44: library part MOLEX_105133-0011, "5 Pin + 1 Shield USB Receptacle", Manufacturer=MOLEX, Manufacturer Part Number=105133-0011, Author="CERN DEM MR", ComponentHeight=6.7mm, Component Type=Standard, CreateDate=13.12.2017, Family=USB, HelpURL=\\cern.ch\dfs\Applications\Altium\Datasheets\MOLEX_105133-0011.pdf, LatestRevisionDate=13.12.2017, Mounted=Yes, Part Description="0.65mm Pitch, Micro-USB Type B Surface Mounte Vertical Receptacle", Part Number=MOLEX_105133-0011, Pin Count=8, PressFit=No, Sense=No, SMD=Yes, Socket=No, Status=None
J45: library part EDGE10T5B10_P200W1000L0F100X400, "PCB Edge Connector 10 (2x5)", Author="CERN DEM MR", ComponentHeight=0mm, Component Type="Standard (No BOM)", CreateDate=14.02.2018, HelpURL=\\cern.ch\dfs\Applications\Altium\Datasheets\EDGE10T5B10_P200W1000L0F100X400.pdf, LatestRevisionDate=14.02.2018, Mounted=No, Part Description="10 Contacts Board Edge Connector, Pitch 2mm, Length 0mm, Width 10mm, Finger Lenght 4mm, Finger Width 1mm", Part Number=EDGE10T5B10_P200W1000L0F100X400, Pin Count=10, PressFit=No, Sense=No, SMD=No, Socket=No, Status=None
J47: library part PHOENIX_1725672, "Terminal Block, 4 Positions, Screw Connection", Manufacturer="PHOENIX CONTACT", Manufacturer Part Number="1725672 (MPT 0,5/4-2,54)", Author="CERN DEM JMW", ComponentHeight=8.5mm, Component Type=Standard, CreateDate=07.11.2008, HelpURL=\\cern.ch\dfs\Applications\Altium\Datasheets\PHOENIX_1725672.pdf, LatestRevisionDate=26.04.2010, Mounted=Yes, Part Description="6A, 63V, Terminal Block, Pitch 2.54mm, 4 Positions, Screw Connection", Part Number=PHOENIX_1725672, Pin Count=4, PressFit=No, Sense=No, SMD=No, Socket=No, Status=None
L7: library part IND_2.2UH_20%_MURATA_LQH44PN2R2MP0L, "Inductor With Core", Case=4040, Manufacturer=MURATA, Manufacturer Part Number=LQH44PN2R2MP0L, Power=1.8A, Resistance=0R049, Tolerance=±20%, Author="CERN DEM JLC", ComponentHeight=1.8mm, Component Type=Standard, CreateDate=14.02.2018, HelpURL=\\cern.ch\dfs\Applications\Altium\Datasheets\IND_MURATA_LQH44PN_P0.pdf, LatestRevisionDate=14.02.2018, Mounted=Yes, Part Description="Wire Wound Ferrite Inductor for Power Lines", Part Number=IND_2.2UH_20%_MURATA_LQH44PN2R2MP0L, Pin Count=2, Sense=No, SMD=Yes, Socket=No, Status=None
L8: library part IND_MURATA_DLW21SN900SQ2L, "Inductor Common Mode", Case=0805, Manufacturer=MURATA, Manufacturer Part Number=DLW21SN900SQ2L, Power=330mA, Resistance=0.35R, Tolerance=±25%, Author="CERN DEM JLC", ComponentHeight=1.4mm, Component Type=Standard, CreateDate=2014-07-01, HelpURL=\\cern.ch\dfs\Applications\Altium\Datasheets\IND_MURATA_DLW21S.pdf, LatestRevisionDate=2014-07-01, Mounted=Yes, Part Description="Wire Wound Common Mode Choke Coil (DLW21S Series)", Part Number=IND_MURATA_DLW21SN900SQ2L, Pin Count=4, SMD=Yes, Socket=No, Status=None, Table="Inductors SMD"
LD9: library part LED_KINGBRIGHT_KPTR-3216CGCK, "LED Green 1A 2C", Manufacturer=KINGBRIGHT, Manufacturer Part Number=KPTR-3216CGCK, Author="CERN DEM MR", Bonding=No, Color=Green, ComponentHeight=0.35mm, Component Type=Standard, CreateDate=15.02.2016, HelpURL=\\cern.ch\dfs\Applications\Altium\Datasheets\LED_KINGBRIGHT_KPTR-3216CGCK.pdf, LatestRevisionDate=15.02.2016, Mounted=Yes, PackageDescription="Reverse Mount LED 3216, Hole 2.1x2.3mm 0.35mm Height", Part Description="Reverse Mount LED 1.4x1.6mm Green", Part Number=LED_KINGBRIGHT_KPTR-3216CGCK, Pin Count=2, PressFit=No, Sense=No, SMD=Yes, Socket=No
PB2: library part PB_TYCO_FSMSM, "Push-Button Switch SPDT", Manufacturer="TYCO ELECTRONICS", Manufacturer Part Number="FSMSM or 1437566-3", Author="CERN DEM JLC", ComponentHeight=4.3mm, Component Type=Standard, CreateDate=30.06.2008, Family="Push Button", HelpURL=\\cern.ch\dfs\Applications\Altium\Datasheets\PB_TYCO_FSMSM.pdf, LatestRevisionDate=21.06.2012, Mounted=Yes, PackageDescription="Body 3.5x6.0mm, Pushbutton Switch,  TYCO ALCOSWITCH FSMSM Serie", Part Description="12VDC 50mA SPST Tactile  Push-Button Switch", Part Number=PB_TYCO_FSMSM, Pin Count=2, PressFit=No, Sense=No, SMD=Yes, Socket=No, Status=None
PCBM1: library part PCBM_ESP32-WROVER-I, "Generic WiFi-BT-BLE MCU Module", Manufacturer=ESPRESSIF, Author="CERN DEM JLC", Bonding=No, ComponentHeight=3.65mm, Component Type=Standard, CreateDate=14.11.2017, Device=ESP32-WROVER-I, HelpURL=\\cern.ch\dfs\Applications\Altium\Datasheets\PCBM_ESP32-WROVER-I.pdf, LatestRevisionDate=14.11.2017, Manufacturer Part Number=ESP32-WROVER-I, Mounted=Yes, PackageDescription="Generic WiFi-BT-BLE MCU Module (IPEX antenna) ,Body 18.00mm x 31.4mm", Part Description="Generic WiFi-BT-BLE MCU Module (IPEX antenna, 32-Mbit PSRAM)", Part Number=PCBM_ESP32-WROVER-I, Pin Count=39, PressFit=No, Sense=No, SMD=Yes, Socket=No
R21 R106: library part R0402_100K_1%_0.0625W_100PPM, "Resistor - 1%", Case=0402, Manufacturer=GENERIC, Manufacturer1 ComponentHeight=0.4mm, Manufacturer1 Example="YAGEO PHYCOMP", Manufacturer1 Part Number=232270671004L, Power=0.0625W, Tolerance=±1%, Author="CERN DEM JLC", Component Type=Standard, CreateDate=03.12.2007, HelpURL=\\cern.ch\dfs\Applications\Altium\Datasheets\R0402_Phycomp_RC0402.pdf, LatestRevisionDate=17.10.2012, Manufacturer Part Number=R0402_100K_1%_0.0625W_100PPM, Mounted=Yes, Part Description="General Purpose Thick Film Chip Resistor", Part Number=R0402_100K_1%_0.0625W_100PPM, Pin Count=2, PressFit=No, Sense=No, SMD=Yes, Socket=No, Status="Not Recommended", TC=±100ppm/°C
R107 R109 R120 R121 R123: library part R0402_10K_1%_0.0625W_100PPM, "Resistor - 1%", Case=0402, Manufacturer=GENERIC, Manufacturer1 ComponentHeight=0.4mm, Manufacturer1 Example="YAGEO PHYCOMP", Manufacturer1 Part Number=232270671003L, Power=0.0625W, Tolerance=±1%, Author="CERN DEM JLC", Component Type=Standard, CreateDate=2007-12-03, HelpURL=\\cern.ch\dfs\Applications\Altium\Datasheets\R0402_Phycomp_RC0402.pdf, LatestRevisionDate=2012-10-17, Manufacturer Part Number=R0402_10K_1%_0.0625W_100PPM, Mounted=Yes, Part Description="General Purpose Thick Film Chip Resistor", Part Number=R0402_10K_1%_0.0625W_100PPM, Pin Count=2, SMD=Yes, Socket=No, Status="Not recommended", Table="Resistors SMD", TC=±100ppm/°C
R108: library part R0402_22K_1%_0.0625W_100PPM, "Resistor - 1%", Case=0402, Manufacturer=GENERIC, Manufacturer1 ComponentHeight=0.4mm, Manufacturer1 Example="YAGEO PHYCOMP", Manufacturer1 Part Number=232270672203L, Power=0.0625W, Tolerance=±1%, Author="CERN DEM JLC", Component Type=Standard, CreateDate=03.12.2007, HelpURL=\\cern.ch\dfs\Applications\Altium\Datasheets\R0402_Phycomp_RC0402.pdf, LatestRevisionDate=17.10.2012, Manufacturer Part Number=R0402_22K_1%_0.0625W_100PPM, Mounted=Yes, Part Description="General Purpose Thick Film Chip Resistor", Part Number=R0402_22K_1%_0.0625W_100PPM, Pin Count=2, PressFit=No, Sense=No, SMD=Yes, Socket=No, Status="Not Recommended", TC=±100ppm/°C
R110 R111 R114 R115: library part R0402_220R_1%_0.0625W_100PPM, "Resistor - 1%", Case=0402, Manufacturer=GENERIC, Manufacturer1 ComponentHeight=0.4mm, Manufacturer1 Example="YAGEO PHYCOMP", Manufacturer1 Part Number=232270672201L, Power=0.0625W, Tolerance=±1%, Author="CERN DEM JLC", Component Type=Standard, CreateDate=03.12.2007, HelpURL=\\cern.ch\dfs\Applications\Altium\Datasheets\R0402_Phycomp_RC0402.pdf, LatestRevisionDate=17.10.2012, Manufacturer Part Number=R0402_220R_1%_0.0625W_100PPM, Mounted=Yes, Part Description="General Purpose Thick Film Chip Resistor", Part Number=R0402_220R_1%_0.0625W_100PPM, Pin Count=2, PressFit=No, Sense=No, SMD=Yes, Socket=No, Status="Not Recommended", TC=±100ppm/°C
R112 R113 R118 R119 R122 R124 R160 R493: library part R0402_1K_1%_0.0625W_100PPM, "Resistor - 1%", Case=0402, Manufacturer=GENERIC, Manufacturer1 ComponentHeight=0.4mm, Manufacturer1 Example="YAGEO PHYCOMP", Manufacturer1 Part Number=232270671002L, Power=0.0625W, Tolerance=±1%, Author="CERN DEM JLC", Component Type=Standard, CreateDate=03.12.2007, HelpURL=\\cern.ch\dfs\Applications\Altium\Datasheets\R0402_Phycomp_RC0402.pdf, LatestRevisionDate=17.10.2012, Manufacturer Part Number=R0402_1K_1%_0.0625W_100PPM, Mounted=Yes, Part Description="General Purpose Thick Film Chip Resistor", Part Number=R0402_1K_1%_0.0625W_100PPM, Pin Count=2, PressFit=No, Sense=No, SMD=Yes, Socket=No, Status="Not Recommended", TC=±100ppm/°C
R117: library part R0402_4K7_1%_0.0625W_100PPM, "Resistor - 1%", Case=0402, Manufacturer=GENERIC, Manufacturer1 ComponentHeight=0.4mm, Manufacturer1 Example="YAGEO PHYCOMP", Manufacturer1 Part Number=232270674702L, Power=0.0625W, Tolerance=±1%, Author="CERN DEM JLC", Component Type=Standard, CreateDate=03.12.2007, HelpURL=\\cern.ch\dfs\Applications\Altium\Datasheets\R0402_Phycomp_RC0402.pdf, LatestRevisionDate=17.10.2012, Manufacturer Part Number=R0402_4K7_1%_0.0625W_100PPM, Mounted=Yes, Part Description="General Purpose Thick Film Chip Resistor", Part Number=R0402_4K7_1%_0.0625W_100PPM, Pin Count=2, PressFit=No, Sense=No, SMD=Yes, Socket=No, Status="Not Recommended", TC=±100ppm/°C
R144: library part RES_1206, "SMD Resistor", Supplier Part Number 1=39K0871, Supplier 1=Newark
R178: library part R0402_3K9_1%_0.0625W_100PPM, "Resistor - 1%", Case=0402, Manufacturer=GENERIC, Manufacturer1 ComponentHeight=0.4mm, Manufacturer1 Example="YAGEO PHYCOMP", Manufacturer1 Part Number=232270673902L, Power=0.0625W, Tolerance=±1%, Author="CERN DEM JLC", Component Type=Standard, CreateDate=03.12.2007, HelpURL=\\cern.ch\dfs\Applications\Altium\Datasheets\R0402_Phycomp_RC0402.pdf, LatestRevisionDate=17.10.2012, Manufacturer Part Number=R0402_3K9_1%_0.0625W_100PPM, Mounted=Yes, Part Description="General Purpose Thick Film Chip Resistor", Part Number=R0402_3K9_1%_0.0625W_100PPM, Pin Count=2, PressFit=No, Sense=No, SMD=Yes, Socket=No, Status="Not Recommended", TC=±100ppm/°C
T5: "45V 100mA Dual NPN General-Purpose Transistor", Case=SOT363, Manufacturer="NXP SEMICONDUCTORS", Author="CERN DEM JMW", Bonding=No, ComponentHeight=1.1mm, Component Type=Standard, CreateDate=10.07.2015, Device=BC847BS, HelpURL=\\cern.ch\dfs\Applications\Altium\Datasheets\BC847BS.pdf, LatestRevisionDate=10.07.2015, Manufacturer Part Number=BC847BS, Mounted=Yes, PackageDescription="SOT363, SC-88, SOT, 0.65mm Pitch, 6 pin, 1.25mm W X 2.00mm L X 1.10mm H, IPC Medium Density", Part Description="45V 100mA Dual NPN General-Purpose Transistor", Part Number=BC847BS, Pin Count=6, PressFit=No, Sense=No, SMD=Yes, Socket=No
T25: "N-CHANNEL MOSFET WITH DIODE", Case=SOT23-3, Manufacturer="ON SEMICONDUCTOR", Author="CERN DEM JLC", Bonding=No, ComponentHeight=1.11mm, Component Type=Standard, CreateDate=23.03.2009, Device=BSS138LT1G, HelpURL=\\cern.ch\dfs\Applications\Altium\Datasheets\BSS138LT1G.pdf, LatestRevisionDate=23.03.2009, Manufacturer Part Number=BSS138LT1G, Mounted=Yes, PackageDescription="SOT23 3-Leads, Pitch 0.95mm - Body 1.4x3mm, IPC Medium Density", Part Description="50V 200mA N-Channel Enhancement Mode Field-Effect Transistor", Part Number=BSS138LT1G, Pin Count=3, PressFit=No, Sense=No, SMD=Yes, Socket=No

## Via types
v1: diameter 19.68, hole 7.87, Top to Bot, tented both sides, 192 vias
v2: diameter 47.24, hole 31.5, Top to Bot, tented both sides, 7 vias
v3: diameter 30, hole 20, Top to Bot, tented both sides, 4 vias

## Nets (pads, with @x,y where several pads share a name; then routed paths per layer and width w, separated by ;. In a path a pad name is that pad's centre, name@x,y a point inside that pad or via, vN(x,y) a via of type N, cw(c..) or ccw(c..) an arc to the next point about the centre after c; other vN are vias at no path point)
CAN_RX: PCBM1.7 R118.1 R493.2 | length 1537.6
  Top w6: v1(744.09,681.1) 746.68,683.68 756.16,683.68 760.91,688.43 772.69,688.43 PCBM1.7@787.4,703.15 802.12,717.87 846.87,717.87 861.55,732.54 861.55,815.92 858.27,819.21 858.27,964.26 862.86,968.85 862.86,1512.07 827.68,1547.24 v1(805.82,1547.24)
  Bot w6: R118.1@561.76,1674.15 598.74,1674.15 636.18,1636.71 636.18,1561.3 673.86,1523.62 720.47,1523.62 736.22,1539.37 795.46,1539.37 803.34,1547.24 v1(805.82,1547.24) ; R493.2@686.42,547.24 686.42,566.86 694.99,575.43 733.2,575.43 748.84,591.07 748.84,645.35 744.09,650.09 v1(744.09,681.1)
CAN_TX: IC28.1 PCBM1.29 | length 1633.2
  Top w6: PCBM1.29@94.49,853.15 95.67,854.33 v1(141.73,854.33) ; v1(334.65,1812.48) 431.23,1812.48 432.68,1811.02 444.49,1822.83 v1(468.5,1822.83)
  Bot w6: v1(141.73,854.33) 158.13,870.73 158.13,871.04 172.28,885.19 172.28,1050.28 244.99,1122.98 252.64,1122.98 311.29,1181.63 311.29,1289.17 304.45,1296.01 304.45,1647.85 317.22,1660.62 317.22,1755.45 327.22,1765.45 327.22,1806.25 333.44,1812.48 v1(334.65,1812.48) ; v1(468.5,1822.83) 513.04,1822.83 546.92,1788.95 546.92,1780.3 590.86,1736.36 615.47,1736.36 676.3,1675.53 695.86,1675.53 737.58,1633.81 751.23,1633.81 760.04,1625 IC28.1@760.04,1606.3
CANH: D27.1 IC28.7 J47.2 | length 517.2
  Bot w6: J47.2@579.92,1948.82 630.85,1897.89 630.85,1793.04 644.5,1779.39 689.23,1779.39 710.04,1800.2 IC28.7@710.04,1818.9 718.85,1827.71 718.85,1924.91 724.35,1930.41 724.35,2010.53 D27.1@702.75,2032.13
CANL: D27.2 IC28.6 J47.3 | length 321.2
  Bot w6: IC28.6@660.04,1818.9 668.85,1827.71 668.85,1937.75 J47.3@679.92,1948.82 679.92,1988.9 661.28,2007.55 661.28,2065.46 D27.2@702.75,2106.94
CLKIN: IC32.1 J46.4 | length 1159
  Top w6: J46.4@157.48,1842.52 164.52,1835.48 294.44,1835.48 315.8,1814.12 315.8,1804.67 352.76,1767.71 v1(385.83,1767.71) ; v1(484.25,1244.09) 484.25,1241.13 483.65,1240.52 485.25,1238.92 485.85,1238.92 511.33,1213.44 530.34,1213.44 542.34,1201.44 555.12,1201.44 558.8,1197.76 563.31,1197.76 v1(624.49,1136.58)
  Bot w6: v1(385.83,1767.71) 375.22,1757.11 375.22,1745.57 366.98,1737.33 366.98,1721.02 366.22,1720.26 366.22,1708.77 365.22,1707.78 365.22,1610.2 352.45,1597.43 352.45,1315.89 405.13,1263.21 425.76,1263.21 438.61,1250.36 457.73,1250.36 463.99,1244.09 v1(484.25,1244.09) ; v1(624.49,1136.58) 624.49,1099.93 647.64,1076.78 IC32.1@647.64,1066.93
DEV_RESETn: PCBM1.23 R21.1 T25.1 | length 895.3
  Top w6: PCBM1.23@94.49,1153.15 105.9,1141.73 v1(149.61,1141.73) ; v1(157.48,775.59) 160.1,778.21 160.1,782.81 160.44,783.15 160.44,839.44 160.57,839.57 160.57,856.51 181.17,877.11 217.38,877.11 v1(259.84,834.64) ; v1@157.48,778.55 157.79,778.86 v1@157.79,783.46
  Bot w6: v1(149.61,1141.73) 88.33,1080.46 88.33,770.85 122.12,737.06 137.73,737.06 157.41,756.75 157.41,775.52 v1(157.48,775.59) ; v1(259.84,834.64) 293.31,834.64 ; T25.1@293.31,883.86 293.31,834.64 ; R21.1@320.08,818.9 320.08,819.68 311.66,828.1 299.85,828.1 293.31,834.64
EMAC_MDC: J43.8 PCBM1.13 | length 2181.9
  Top w6: v1(307.09,2322.83) 310.79,2322.83 321.89,2311.73 330,2311.73 334.64,2307.08 v1(334.64,2240.15) ; v1@531.36,1286.53 535.32,1290.49 670.2,1290.49 682.01,1278.68 v1(685.04,1278.68) ; PCBM1.13@787.4,1003.15 798.23,1003.15 818.07,983.31 818.94,984.19 v1@818.94,988.19
  Bot w6: J43.8@157.48,2492.13 169.29,2503.93 234.62,2503.93 241.45,2510.76 241.45,2527.49 252.49,2538.53 254.64,2538.53 254.99,2538.18 264.93,2538.18 265.27,2538.53 268.1,2538.53 279.14,2527.49 279.14,2518.65 333.8,2463.98 333.8,2424.33 288.24,2378.77 288.24,2354.4 294.91,2347.73 294.91,2337.3 307.09,2325.12 v1(307.09,2322.83) ; v1(334.64,2240.15) 334.64,2162.47 335.77,2161.35 335.77,2145.74 329.22,2139.19 329.22,2091.81 337.46,2083.57 337.46,2020.85 358.18,2000.12 358.18,1968.28 397.44,1929.02 414.04,1912.42 414.04,1862.82 431.29,1845.56 431.29,1792.8 429.82,1791.33 429.82,1764.93 431.29,1763.46 431.29,1608.39 400.45,1577.55 400.45,1335.77 419.06,1317.16 474.96,1317.16 493.18,1298.93 506.97,1298.93 520.9,1285 532.88,1285 v1(535.5,1282.39) ; v1(685.04,1278.68) 790.5,1173.23 790.5,1016.59 v1(818.9,988.19)
EMAC_MDIO: J43.10 R115.1 | length 341.6
  Top w6: v1(244.09,2374.02) 274.75,2343.36 317.13,2343.36 321.08,2347.3 330.64,2347.3 333.73,2350.39 340.55,2350.39 v1(340.55,2384.93) v1@342.43,2386.81
  Bot w6: J43.10@157.48,2334.64 215.6,2334.64 244.09,2363.14 v1(244.09,2374.02) ; v1(340.55,2384.93) 342.76,2382.73 397.81,2382.73 R115.1@415.41,2400.32
EMAC_RX_DV: J46.3 PCBM1.12 | length 1549.5
  Top w6: J46.3@157.48,1921.26 157.92,1921.7 160.24,1919.38 v1(363.24,1919.38) ; v1(555.12,1232.28) 614.41,1232.28 625.96,1243.83 627.86,1243.83 629.44,1245.41 639.11,1245.41 v1(641.73,1248.03) ; v1(748.03,952.76) 787.01,952.76 PCBM1.12@787.4,953.15
  Bot w6: v1(363.24,1919.38) 389.49,1893.13 389.49,1853.43 404.67,1838.24 404.67,1733.32 407.29,1730.69 407.29,1618.33 376.45,1587.49 376.45,1325.83 415.07,1287.21 470.83,1287.21 483.11,1274.93 497.03,1274.93 520.83,1251.13 526.94,1251.13 545.79,1232.28 v1(555.12,1232.28) ; v1@642.95,1257.12 693.65,1206.41 710,1206.41 760.71,1155.7 760.71,966.72 748.03,954.04 v1(748.03,952.76)
EMAC_RXD0: J46.6 PCBM1.10 | length 1953.4
  Top w6: v1(204.55,2138.16) 267.73,2138.16 267.91,2137.98 309.03,2179.1 v1(314.96,2179.1) ; v1(555.12,1259.84) 618.88,1259.84 622.89,1255.83 633.93,1266.87 647.25,1266.87 652.03,1271.65 663.84,1259.84 v1(666.87,1259.84) ; v1(735.04,851.58) 785.83,851.58 PCBM1.10@787.4,853.15
  Bot w6: J46.6@195.91,2078.74 195.91,2109.3 204.55,2117.93 v1(204.55,2138.16) ; v1(314.96,2179.1) 317.22,2176.84 317.22,2086.84 325.46,2078.6 325.46,2015.88 346.18,1995.15 346.18,1954.81 362.77,1938.22 371.04,1938.22 401.49,1907.78 401.49,1858.4 416.67,1843.22 416.67,1741.61 419.29,1738.99 419.29,1613.36 388.45,1582.52 388.45,1330.8 420.04,1299.21 475.94,1299.21 488.21,1286.93 502,1286.93 525.81,1263.13 531.91,1263.13 535.2,1259.84 v1(555.12,1259.84) ; v1@662.93,1266.2 669.29,1259.84 669.6,1259.84 669.6,1257.11 708.3,1218.41 714.97,1218.41 772.71,1160.67 772.71,889.25 v1(735.04,851.58)
EMAC_RXD1: J46.5 PCBM1.11 | length 1393.4
  Top w6: J46.5@157.48,1763.78 159.09,1762.17 241.71,1762.17 280.99,1722.89 v1(388.45,1722.89) ; v1@522.8,1228.62 523.85,1229.67 525.46,1229.67 529.68,1225.44 535.31,1225.44 547.31,1213.44 638.87,1213.44 645.9,1220.47 v1(649.6,1220.47) ; v1(740.16,905.51) 785.04,905.51 PCBM1.11@787.4,903.15
  Bot w6: v1(388.45,1722.89) 388.45,1616.46 364.45,1592.46 364.45,1320.86 410.1,1275.21 464.03,1275.21 476.31,1262.93 492.06,1262.93 503.09,1251.9 503.09,1244.02 512.75,1234.37 517.05,1234.37 v1(519.14,1232.28) ; v1(649.6,1220.47) 711.03,1159.05 711.03,1093.52 722.16,1082.39 722.16,1027.63 725.45,1024.34 725.45,920.22 v1(740.16,905.51)
EMAC_TXD0: J46.7 PCBM1.31 | length 1569.8
  Top w6: PCBM1.31@94.49,753.15 97.24,755.9 v1(129.92,755.9) ; v1(228.35,1960.63) 228.35,1962.43 237.23,1971.31 285.36,1971.31 v1@291.34,1977.29
  Bot w6: v1(129.92,755.9) 129.92,780.44 148.76,799.28 148.76,820.65 118.95,850.46 118.95,1032.91 267.53,1181.49 267.53,1322.7 273.61,1328.78 273.61,1461.48 280.08,1467.95 280.08,1707.34 293.22,1720.48 293.22,1765.39 303.22,1775.39 303.22,1824.67 314.5,1835.94 314.5,1872.07 287.58,1898.99 287.58,1966.94 v1@291.34,1970.7 ; J46.7@157.48,2000 203.79,2000 220.47,2016.69 233.69,2003.47 228.35,1998.12 v1(228.35,1960.63)
  other v1: 291.34,1972.44
EMAC_TXD1: J46.10 PCBM1.36 | length 1414.2
  Top w6: v1(51.18,503.94) 93.7,503.94 PCBM1.36@94.49,503.15
  Bot w6: v1(51.18,503.94) 12.46,542.65 12.46,1656.68 81.74,1725.96 81.74,1747.09 98.43,1763.78 J46.10@157.48,1763.78
EMAC_TXDEN: J46.8 PCBM1.33 | length 1579.4